# Altium PCB 电眼主板.PcbDoc (part 5 of 5)
Units mm, origin at the board's own origin, x right, y up, seen from the top; angles counter-clockwise.
Board outline 180 x 100 mm, 2 copper layers (Top Layer, Bottom Layer); 210 components, 262 nets, 810 pads, 212 vias.
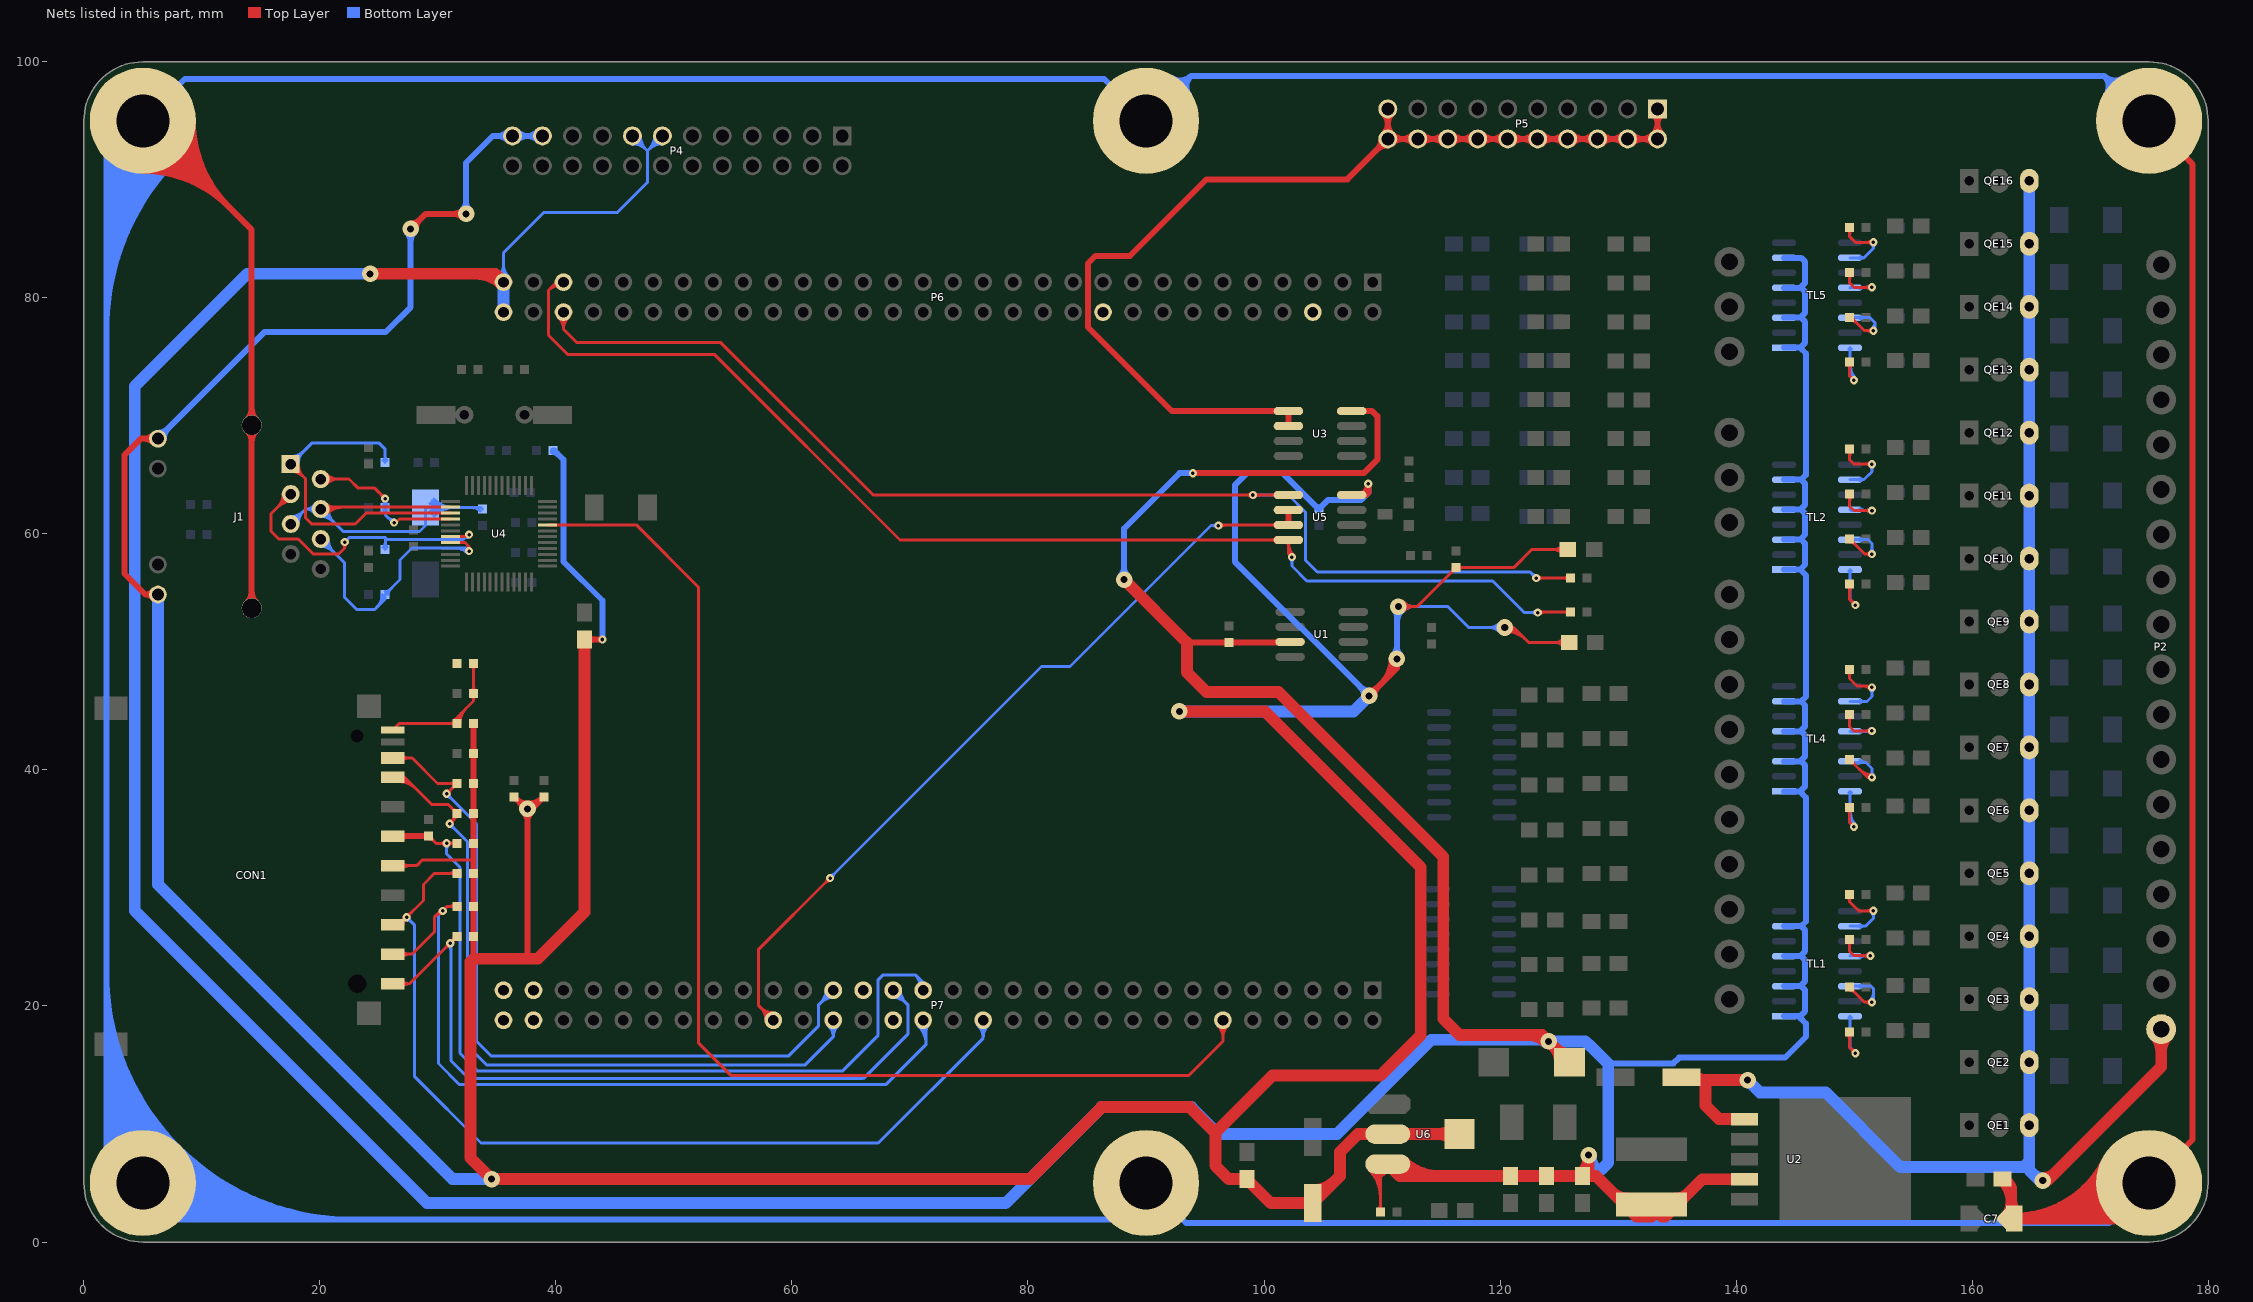
[diagram p5: the nets of this part, all layers, seen from the top]

## Via types
v1: diameter 0.7, hole 0.3, Top Layer to Bottom Layer, 163 vias
v2: diameter 1.4, hole 0.6, Top Layer to Bottom Layer, 49 vias

## Nets (pads, with @x,y where several pads share a name; then routed paths per layer and width w, separated by ;. In a path a pad name is that pad's centre, name@x,y a point inside that pad or via, vN(x,y) a via of type N, cw(c..) or ccw(c..) an arc to the next point about the centre after c; other vN are vias at no path point) (continued)
OUT_CH0: R1.1 TL1.16 | length 7.7
  Top Layer w0.254: R1.1@149.426,17.6 cw(c148.993,17.167) 149.606,17.167 cw(c150.219,17.167) R1.1@149.786,17.6 ; R1.1@149.606,17.78 149.606,16.51 v1(150.114,16.002) ; v1@149.891,16.002 ccw(c149.353,16.002) 149.733,16.383 ccw(c150.114,16.763) v1@150.114,16.225
  Bottom Layer w0.254: TL1.16@149.557,19.029 cw(c149.297,18.769) 149.665,18.769 cw(c150.033,18.769) TL1.16@149.773,19.029 ; TL1.16@149.665,19.137 149.665,16.451 v1(150.114,16.002)
OUT_CH1: R2.1 TL1.14 | length 8.8
  Top Layer w0.254: R2.1@149.606,21.336 cw(c149.606,20.723) 150.04,21.156 cw(c150.473,21.59) R2.1@149.86,21.59 ; R2.1@149.606,21.59 150.876,20.32 v1(151.511,20.32) ; v1@151.353,20.162 ccw(c150.973,19.782) 150.973,20.32 ccw(c150.973,20.858) v1@151.353,20.478
  Bottom Layer w0.254: TL1.14@149.665,21.677 151.424,21.677 151.638,21.463 151.638,20.447 v1(151.511,20.32) ; TL1.14@150.509,21.569 cw(c150.77,21.309) 150.77,21.677 cw(c150.77,22.045) TL1.14@150.509,21.785 ; v1@151.353,20.478 ccw(c150.666,21.165) 151.638,21.165
OUT_CH2: R3.1 TL1.12 | length 7.7
  Top Layer w0.254: R3.1@149.426,25.474 cw(c148.993,25.041) 149.606,25.041 cw(c150.219,25.041) R3.1@149.786,25.474 ; R3.1@149.606,25.654 149.606,24.638 149.987,24.257 v1(151.384,24.257) ; v1@151.226,24.099 ccw(c150.846,23.719) 150.846,24.257 ccw(c150.846,24.795) v1@151.226,24.415
  Bottom Layer w0.254: TL1.12@149.665,24.217 149.705,24.257 v1(151.384,24.257) ; TL1.12@150.509,24.109 cw(c150.866,23.753) 150.866,24.257 ; v1@151.226,24.099 ccw(c150.846,23.719) 150.846,24.257 ccw(c150.846,24.795) v1@151.226,24.415
OUT_CH3: R4.1 TL1.10 | length 9.1
  Top Layer w0.254: R4.1@149.426,29.284 cw(c148.993,28.851) 149.606,28.851 cw(c150.219,28.851) R4.1@149.786,29.284 ; R4.1@149.606,29.464 149.606,28.829 150.368,28.067 v1(151.638,28.067) ; v1@151.48,27.909 ccw(c151.1,27.529) 151.1,28.067 ccw(c151.1,28.605) v1@151.48,28.225
  Bottom Layer w0.254: TL1.10@149.665,26.757 150.963,26.757 151.638,27.432 v1(151.638,28.067) ; TL1.10@150.509,26.649 cw(c150.77,26.389) 150.77,26.757 cw(c150.77,27.125) TL1.10@150.509,26.865 ; v1@151.48,27.909 cw(c151.1,27.529) 151.638,27.529 cw(c152.176,27.529) v1@151.796,27.909
OUT_CH4: R5.1 TL4.16 | length 8.6
  Top Layer w0.254: R5.1@149.426,36.65 cw(c148.993,36.217) 149.606,36.217 cw(c150.219,36.217) R5.1@149.786,36.65 ; R5.1@149.606,36.83 149.606,35.56 v1(149.987,35.179)
  Bottom Layer w0.254: TL4.16@149.557,38.079 cw(c149.297,37.819) 149.665,37.819 cw(c150.033,37.819) TL4.16@149.773,38.079 ; 149.665,35.882 ccw(c150.69,35.882) v1@149.965,35.157 ; 149.665,36.495 ccw(c151.303,36.495) v1@150.145,35.337 ; TL4.16@149.665,38.187 149.665,35.501 v1(149.987,35.179)
OUT_CH5: R6.1 TL4.14 | length 9.5
  Top Layer w0.254: R6.1@149.606,40.64 cw(c149.606,40.027) 150.04,40.46 cw(c150.473,40.894) R6.1@149.86,40.894 ; R6.1@149.606,40.894 151.13,39.37 v1(151.511,39.37) ; 150.48,40.02 ccw(c151.511,41.051) v1@151.511,39.593 ; 150.914,39.586 ccw(c151.511,40.184) v1@151.511,39.339
  Bottom Layer w0.254: TL4.14@149.665,40.727 149.752,40.64 151.003,40.64 151.511,40.132 v1(151.511,39.37) ; TL4.14@150.509,40.835 ccw(c150.98,41.305) 150.98,40.64 ; v1@151.353,39.528 ccw(c150.973,39.908) 151.511,39.908 ccw(c152.049,39.908) v1@151.669,39.528
OUT_CH6: R7.1 TL4.12 | length 8.2
  Top Layer w0.254: R7.1@149.426,44.524 cw(c148.993,44.091) 149.606,44.091 cw(c150.219,44.091) R7.1@149.786,44.524 ; R7.1@149.606,44.704 149.606,43.688 149.987,43.307 v1(151.511,43.307) ; v1@151.353,43.149 ccw(c150.973,42.769) 150.973,43.307 ccw(c150.973,43.845) v1@151.353,43.465
  Bottom Layer w0.254: TL4.12@149.665,43.267 151.344,43.267 151.384,43.307 v1(151.511,43.307) ; TL4.12@150.509,43.159 cw(c150.77,42.899) 150.77,43.267 cw(c150.77,43.635) TL4.12@150.509,43.375 ; 150.876,43.267 ccw(c150.876,43.942) v1@151.353,43.465 ; 151.069,43.267 cw(c151.069,42.865) v1@151.353,43.149
OUT_CH7: R8.1 TL4.10 | length 8.9
  Top Layer w0.254: R8.1@149.426,48.334 cw(c148.993,47.901) 149.606,47.901 cw(c150.219,47.901) R8.1@149.786,48.334 ; R8.1@149.606,48.514 149.606,47.752 150.241,47.117 151.13,47.117 151.257,46.99 v1(151.511,46.99) ; 150.666,47.117 cw(c150.666,46.145) v1@151.353,46.832
  Bottom Layer w0.254: TL4.10@149.665,45.807 151.09,45.807 151.511,46.228 v1(151.511,46.99) ; TL4.10@150.509,45.699 cw(c150.77,45.439) 150.77,45.807 cw(c150.77,46.175) TL4.10@150.509,45.915 ; v1@151.353,46.832 cw(c150.973,46.452) 151.511,46.452 cw(c152.049,46.452) v1@151.669,46.832
OUT_CH8: R9.1 TL2.16 | length 7.6
  Top Layer w0.254: R9.1@149.452,55.573 cw(c149.018,55.14) 149.631,55.14 cw(c150.244,55.14) R9.1@149.811,55.573 ; R9.1@149.631,55.753 149.631,54.458 v1(150.114,53.975) ; v1@149.891,53.975 ccw(c149.353,53.975) 149.733,54.356 ccw(c150.114,54.736) v1@150.114,54.198
  Bottom Layer w0.254: TL2.16@149.557,56.875 cw(c149.297,56.615) 149.665,56.615 cw(c150.033,56.615) TL2.16@149.773,56.875 ; TL2.16@149.665,56.983 149.665,54.424 v1(150.114,53.975)
OUT_CH9: R10.1 TL2.14 | length 8.5
  Top Layer w0.254: R10.1@149.631,59.309 cw(c149.631,58.696) 150.065,59.129 cw(c150.498,59.563) R10.1@149.885,59.563 ; R10.1@149.631,59.563 150.901,58.293 v1(151.511,58.293) ; v1@151.353,58.135 ccw(c150.973,57.755) 150.973,58.293 ccw(c150.973,58.831) v1@151.353,58.451
  Bottom Layer w0.254: TL2.14@149.665,59.523 151.17,59.523 151.511,59.182 v1(151.511,58.293) ; TL2.14@150.509,59.415 cw(c150.77,59.155) 150.77,59.523 cw(c150.77,59.891) TL2.14@150.509,59.631 ; v1@151.353,58.451 ccw(c150.973,58.831) 151.511,58.831 ccw(c152.049,58.831) v1@151.669,58.451
OUT_CH10: R11.1 TL2.12 | length 8.1
  Top Layer w0.254: R11.1@149.452,63.193 cw(c149.018,62.76) 149.631,62.76 cw(c150.244,62.76) R11.1@149.811,63.193 ; R11.1@149.631,63.373 149.631,62.332 149.987,61.976 151.512,61.976 v1(151.518,61.983) ; 150.964,61.976 ccw(c150.964,62.537) v1@151.361,62.14 ; 150.996,61.976 cw(c150.996,61.46) v1@151.361,61.825
  Bottom Layer w0.254: TL2.12@149.665,62.063 149.745,61.983 v1(151.518,61.983) ; TL2.12@150.509,62.171 ccw(c150.963,62.625) 150.963,61.983 ; v1@151.361,61.825 ccw(c150.98,61.444) 150.98,61.983 ccw(c150.98,62.521) v1@151.361,62.14
OUT_CH11: R12.1 TL2.10 | length 8.9
  Top Layer w0.254: R12.1@149.452,67.003 cw(c149.018,66.57) 149.631,66.57 cw(c150.244,66.57) R12.1@149.811,67.003 ; R12.1@149.631,67.183 149.631,66.269 149.987,65.913 v1(151.511,65.913) ; v1@151.353,65.755 ccw(c150.973,65.375) 150.973,65.913 ccw(c150.973,66.451) v1@151.353,66.071
  Bottom Layer w0.254: TL2.10@149.665,64.603 150.836,64.603 151.511,65.278 v1(151.511,65.913) ; TL2.10@150.509,64.495 cw(c150.77,64.235) 150.77,64.603 cw(c150.77,64.971) TL2.10@150.509,64.711 ; v1@151.353,65.755 cw(c150.973,65.375) 151.511,65.375 cw(c152.049,65.375) v1@151.669,65.755
OUT_CH12: R13.1 TL5.16 | length 8.2
  Top Layer w0.254: R13.1@149.452,74.369 cw(c149.018,73.936) 149.631,73.936 cw(c150.244,73.936) R13.1@149.811,74.369 ; R13.1@149.631,74.549 149.631,73.381 v1(149.987,73.025)
  Bottom Layer w0.254: TL5.16@149.557,75.671 cw(c149.297,75.411) 149.665,75.411 cw(c150.033,75.411) TL5.16@149.773,75.671 ; 149.665,73.728 ccw(c150.69,73.728) v1@149.965,73.003 ; 149.665,74.341 ccw(c151.303,74.341) v1@150.145,73.183 ; TL5.16@149.665,75.779 149.665,73.347 v1(149.987,73.025)
OUT_CH13: R14.1 TL5.14 | length 8.6
  Top Layer w0.254: R14.1@149.631,78.105 cw(c149.631,77.246) 150.239,77.853 ; R14.1@149.631,78.359 149.733,78.359 150.876,77.216 v1(151.638,77.216) v1@151.765,77.089 ; R14.1@149.885,78.359 ccw(c150.253,78.359) R14.1@149.993,78.099 ; v1@151.48,77.058 ccw(c151.1,76.678) 151.1,77.216 ccw(c151.1,77.754) v1@151.48,77.374
  Bottom Layer w0.254: TL5.14@149.665,78.319 151.344,78.319 151.765,77.898 ; TL5.14@150.509,78.211 cw(c150.77,77.951) 150.77,78.319 cw(c150.77,78.687) TL5.14@150.509,78.427 ; v1@151.508,77.397 ccw(c151.149,77.898) 151.765,77.898 ; v1(151.638,77.216) 151.765,77.343 151.765,77.898
OUT_CH14: R15.1 TL5.12 | length 7.9
  Top Layer w0.254: R15.1@149.452,81.989 cw(c149.018,81.556) 149.631,81.556 cw(c150.244,81.556) R15.1@149.811,81.989 ; R15.1@149.631,82.169 149.631,81.255 149.987,80.899 v1(151.511,80.899) ; v1@151.353,80.741 ccw(c150.973,80.361) 150.973,80.899 ccw(c150.973,81.437) v1@151.353,81.057
  Bottom Layer w0.254: TL5.12@149.665,80.859 149.705,80.899 v1(151.511,80.899) ; TL5.12@150.509,80.751 cw(c150.866,80.395) 150.866,80.899 ; v1@151.353,80.741 ccw(c150.973,80.361) 150.973,80.899 ccw(c150.973,81.437) v1@151.353,81.057
OUT_CH15: R16.1 TL5.10 | length 9
  Top Layer w0.254: R16.1@149.452,85.799 cw(c149.018,85.366) 149.631,85.366 cw(c150.244,85.366) R16.1@149.811,85.799 ; R16.1@149.631,85.979 149.631,85.192 150.114,84.709 v1(151.638,84.709) ; v1@151.48,84.551 ccw(c151.1,84.171) 151.1,84.709 ccw(c151.1,85.247) v1@151.48,84.867
  Bottom Layer w0.254: TL5.10@149.665,83.399 150.836,83.399 151.638,84.201 ; TL5.10@150.509,83.291 cw(c150.77,83.031) 150.77,83.399 cw(c150.77,83.767) TL5.10@150.509,83.507 ; v1@151.487,84.545 cw(c151.171,84.201) 151.638,84.201 ; v1(151.638,84.709) 151.638,84.201 ; v1@151.789,84.545 ccw(c152.105,84.201) 151.638,84.201
P24V: C5.1 P2.18 QE1.3 QE2.3 QE3.3 QE4.3 QE5.3 QE6.3 QE7.3 QE8.3 QE9.3 QE10.3 QE11.3 QE12.3 QE13.3 QE14.3 QE15.3 QE16.3 U2.1 | length 150.3
  Top Layer w1: C5.1@135.382,13.97 135.636,13.716 137.414,13.716 ; C5.1@136.409,14.147 ccw(c137.449,15.187) 137.449,13.716 ; v2@140.462,13.716 v2(140.97,13.716) 137.414,13.716 ; U2.1@140.716,10.414 138.557,10.414 137.414,11.557 137.414,13.716 ; v2(165.989,5.207) 166.37,5.207 176.022,14.859 P2.18@176.022,18.034 ; v2@165.989,5.407 ccw(c165.989,6.81) 166.981,5.818 ; P2.18@175.478,17.49 cw(c174.163,16.175) 176.022,16.175 cw(c177.881,16.175) P2.18@176.566,17.49 ; 137.414,13.716 cw(c137.414,15.104) 136.412,14.143 ccw(c137.414,15.104) 137.414,13.716
  Bottom Layer w1: v2(140.97,13.716) 142.008,12.678 147.596,12.678 153.924,6.35 164.338,6.35 164.846,6.858 ; 164.846,7.112 164.846,6.858 ; QE16.3@164.846,89.916 QE15.3@164.846,84.582 QE14.3@164.846,79.248 QE13.3@164.846,73.914 QE12.3@164.846,68.58 QE11.3@164.846,63.246 QE10.3@164.846,57.912 QE9.3@164.846,52.578 QE8.3@164.846,47.244 QE7.3@164.846,41.91 QE6.3@164.846,36.576 QE5.3@164.846,31.242 QE4.3@164.846,25.908 QE3.3@164.846,20.574 QE2.3@164.846,15.24 QE1.3@164.846,9.906 164.846,6.858 ; 165.214,5.728 ccw(c165.989,6.503) v2@165.989,5.407 ; v2(165.989,5.207) 165.735,5.207 164.846,6.096 164.846,6.858
PB12: P7.60
PB13: P7.59
PB14: P7.58
PB15: P7.57
PC13: P6.6
PG: C7.1 J1.13 J1.14 pad.0 R39.2 | length 1122.4
  Top Layer w0.508: pad.0@5,90.754 cw(c5,80.503) 12.248,87.752 cw(c19.497,95) pad.0@9.246,95 ; pad.0@5,91.262 cw(c5,82.238) 11.381,88.619 cw(c17.762,95) pad.0@8.738,95 ; pad.0@5,91.77 cw(c5,83.972) 10.514,89.486 cw(c16.028,95) pad.0@8.23,95 ; pad.0@5,92.278 cw(c5,85.707) 9.647,90.353 cw(c14.293,95) pad.0@7.722,95 ; pad.0@5,92.786 cw(c5,87.441) 8.78,91.22 cw(c12.559,95) pad.0@7.214,95 ; pad.0@5,95 14.224,85.776 J1.13@14.224,69.218 J1.14@14.224,53.718 ; J1.14@13.803,54.139 ccw(c12.785,55.157) 14.224,55.157 ccw(c15.663,55.157) J1.14@14.645,54.139 ; J1.13@13.803,68.797 cw(c12.785,67.779) 14.224,67.779 cw(c15.663,67.779) J1.13@14.645,68.797 ; J1.13@13.803,69.639 ccw(c12.785,70.657) 14.224,70.657 ccw(c15.663,70.657) J1.13@14.645,69.639 ; pad.0@175,5 178.689,8.689 178.689,91.311 pad.0@175,95
  Top Layer w1: R39.2@162.56,5.334 163.322,4.572 163.322,2.235 C7.1@163.576,1.981 ; R39.2@162.592,5.239 cw(c160.828,3.475) 163.322,3.475 ; R39.2@162.654,5.203 cw(c162.433,4.342) 163.322,4.342 ; C7.1@162.842,2.131 ccw(c161.685,3.288) 163.322,3.288 ; 163.322,3.493 ccw(c164.699,3.493) C7.1@163.725,2.519 ; 165.204,1.981 ccw(c165.204,9.963) pad.0@172.324,6.356 ; 166.832,1.981 ccw(c166.832,9.138) pad.0@173.216,5.904 ; 168.459,1.981 ccw(c168.459,8.314) pad.0@174.108,5.452 ; 170.087,1.981 ccw(c170.087,7.489) pad.0@175,5 171.981,1.981 C7.1@163.576,1.981 ; pad.0@171.432,6.808 cw(c163.576,10.787) C7.1@163.576,1.981
  Bottom Layer w0.508: 1.905,9.232 ccw(c9.232,9.232) 4.051,4.051 ccw(c9.232,9.232) 9.232,1.905 ; 1.905,10.459 ccw(c10.459,10.459) 4.41,4.41 ccw(c10.459,10.459) 10.459,1.905 ; 1.905,11.685 ccw(c11.685,11.685) 4.769,4.769 ccw(c11.685,11.685) 11.685,1.905 ; 1.905,12.911 ccw(c12.911,12.911) 5.129,5.129 ccw(c12.911,12.911) 12.911,1.905 ; 1.905,14.138 ccw(c14.138,14.138) 5.488,5.488 ccw(c14.138,14.138) 14.138,1.905 ; 1.905,15.364 ccw(c15.364,15.364) 5.847,5.847 ccw(c15.364,15.364) 15.364,1.905 ; 1.905,16.591 ccw(c16.591,16.591) 6.206,6.206 ccw(c16.591,16.591) 16.591,1.905 ; 1.905,17.817 ccw(c17.817,17.817) 6.566,6.566 ccw(c17.817,17.817) 17.817,1.905 ; 1.905,19.043 ccw(c19.043,19.043) 6.925,6.925 ccw(c19.043,19.043) 19.043,1.905 ; 1.905,20.27 ccw(c20.27,20.27) 7.284,7.284 ccw(c20.27,20.27) 20.27,1.905 ; 1.905,21.496 ccw(c21.496,21.496) 7.643,7.643 ccw(c21.496,21.496) 21.496,1.905 ; 1.905,22.723 ccw(c22.723,22.723) 8.002,8.002 ccw(c22.723,22.723) 22.723,1.905 ; 1.905,77.277 cw(c22.723,77.277) pad.0@8.002,91.998 ; 1.905,78.504 cw(c21.496,78.504) pad.0@7.643,92.357 ; 1.905,79.73 cw(c20.27,79.73) pad.0@7.284,92.716 ; 1.905,80.957 cw(c19.043,80.957) pad.0@6.925,93.075 ; 1.905,82.183 cw(c17.817,82.183) pad.0@6.566,93.434 ; 1.905,83.409 cw(c16.591,83.409) pad.0@6.206,93.794 ; 1.905,84.636 cw(c15.364,84.636) pad.0@5.847,94.153 ; 1.905,85.862 cw(c14.138,85.862) pad.0@5.488,94.512 ; 1.905,87.089 cw(c12.911,87.089) pad.0@5.129,94.871 ; 1.905,88.315 cw(c11.685,88.315) pad.0@4.769,95.231 ; 1.905,89.541 cw(c10.459,89.541) pad.0@4.41,95.59 ; 1.905,90.768 cw(c9.232,90.768) pad.0@4.051,95.949 ; pad.0@91.955,98.186 ccw(c92.549,99.153) 93.351,98.351 ccw(c94.153,97.549) pad.0@93.186,96.955 ; pad.0@92.221,98.619 ccw(c92.895,99.717) 93.806,98.806 ; pad.0@93.619,97.221 cw(c94.717,97.895) 93.806,98.806 ; pad.0@171.381,97.221 ccw(c170.283,97.895) 171.194,98.806 ccw(c172.105,99.717) pad.0@172.779,98.619 ; pad.0@171.814,96.955 ccw(c170.847,97.549) 171.649,98.351 ccw(c172.451,99.153) pad.0@173.045,98.186 ; pad.0@175,5 171.611,1.611 93.389,1.611 pad.0@90,5 86.905,1.905 8.095,1.905 pad.0@5,5 1.905,8.095 1.905,91.905 pad.0@5,95 8.552,98.552 86.448,98.552 pad.0@90,95 93.806,98.806 ; pad.0@175,95 171.194,98.806 93.806,98.806
PG15: P7.12 U4.32 | length 105.9
  Top Layer w0.254: U4.32@39.283,60.768 46.801,60.768 52.07,55.499 52.07,16.891 54.864,14.097 93.599,14.097 96.52,17.018 P7.12@96.52,18.796 ; P7.12@96.079,18.355 cw(c95.016,17.292) 96.52,17.292 cw(c98.024,17.292) P7.12@96.961,18.355 ; P7.12@96.259,18.535 cw(c95.629,17.905) 96.52,17.905 cw(c97.411,17.905) P7.12@96.781,18.535
RESET: P6.20
RS485_RE: P7.42 U5.2 U5.3 | length 75.6
  Top Layer w0.254: P7.42@57.797,18.796 ccw(c56.293,18.796) 57.356,19.86 ccw(c58.42,20.923) P7.42@58.42,19.419 ; P7.42@58.051,18.796 ccw(c57.16,18.796) 57.79,19.426 ccw(c58.42,20.056) P7.42@58.42,19.165 ; P7.42@58.42,18.796 57.15,20.066 57.15,24.765 v1(63.226,30.841) ; v1@63.003,30.841 cw(c62.464,30.841) 62.845,30.46 cw(c63.226,30.079) v1@63.226,30.618 ; v1(96.139,60.706) 96.19,60.757 U5.3@102.071,60.757 ; v1@96.297,60.548 cw(c96.8,60.045) 96.8,60.757 ; v1@96.297,60.864 ccw(c96.555,61.122) 96.555,60.757 ; U5.3@101.013,60.599 ccw(c100.633,60.218) 100.633,60.757 ccw(c100.633,61.295) U5.3@101.013,60.914
  Top Layer w0.508: U5.3@102.071,60.757 U5.2@102.071,62.027
  Bottom Layer w0.254: v1(63.226,30.841) 81.153,48.768 83.566,48.768 95.504,60.706 v1(96.139,60.706) ; v1@63.226,31.064 ccw(c63.226,31.602) 63.607,31.222 ccw(c63.987,30.841) v1@63.449,30.841 ; v1@95.981,60.548 ccw(c95.601,60.168) 95.601,60.706 ccw(c95.601,61.244) v1@95.981,60.864
SDCLK: C2.2 CON1.5 P7.31 R20.2 | length 78.9
  Top Layer w0.254: C2.2@29.177,34.384 C2.2@29.21,34.417 29.845,33.782 R20.2@31.623,33.782 ; C2.2@29.21,34.163 cw(c29.21,33.55) 29.644,33.983 cw(c30.077,34.417) C2.2@29.464,34.417 ; v1@30.576,33.624 ccw(c30.196,33.244) 30.196,33.782 ccw(c30.196,34.32) v1@30.576,33.94 ; v1@30.892,33.624 cw(c31.272,33.244) 31.272,33.782 cw(c31.272,34.32) v1@30.892,33.94 ; R20.2@31.443,33.602 ccw(c31.01,33.169) 31.01,33.782 ccw(c31.01,34.395) R20.2@31.443,33.962
  Top Layer w0.508: CON1.5@26.162,34.384 C2.2@29.177,34.384 ; CON1.5@26.836,34.21 cw(c27.256,33.79) 27.256,34.384 cw(c27.256,34.978) CON1.5@26.836,34.558 ; 28.824,34.384 ccw(c28.824,34.803) C2.2@29.12,34.507
  Bottom Layer w0.254: v1@30.576,33.624 cw(c30.196,33.244) 30.734,33.244 cw(c31.272,33.244) v1@30.892,33.624 ; v1(30.734,33.782) 30.734,32.893 31.877,31.75 31.877,16.002 33.401,14.478 64.262,14.478 67.31,17.526 67.31,22.225 67.691,22.606 70.485,22.606 71.12,21.971 P7.31@71.12,21.336 ; 70.468,22.623 cw(c69.628,21.783) P7.31@70.766,21.442 ; 70.769,22.322 cw(c70.092,21.644) P7.31@71.01,21.369
SDCMD: CON1.2 P7.28 R21.2 | length 86.2
  Top Layer w0.254: CON1.2@26.162,26.884 26.71,26.884 v1(27.345,27.519) ; CON1.2@26.676,27.257 ccw(c26.71,28.154) v1(27.345,27.519) ; CON1.2@27.035,26.884 cw(c27.821,26.884) v1@27.265,27.439 ; v1@27.122,27.519 cw(c26.583,27.519) 26.964,27.139 cw(c27.345,26.758) v1@27.345,27.296 ; v1@27.345,27.742 ccw(c27.345,28.281) 27.725,27.9 ccw(c28.106,27.519) v1@27.568,27.519 ; R21.2@31.443,31.062 ccw(c31.01,30.629) 31.01,31.242 ccw(c31.01,31.855) R21.2@31.443,31.422 ; R21.2@31.623,31.242 29.718,31.242 28.771,30.295 28.771,28.946 v1(27.345,27.519)
  Bottom Layer w0.254: v1@27.345,27.296 cw(c27.345,26.758) 27.725,27.139 cw(c28.106,27.519) v1@27.568,27.519 ; v1(27.345,27.519) 28.027,26.837 28.027,14.01 33.655,8.382 67.31,8.382 76.2,17.272 P7.28@76.2,18.796 ; P7.28@75.759,18.355 cw(c74.696,17.292) 76.2,17.292 cw(c77.704,17.292) P7.28@76.641,18.355 ; P7.28@75.939,18.535 cw(c75.309,17.905) 76.2,17.905 cw(c77.091,17.905) P7.28@76.461,18.535
SDDATA0: CON1.7 P7.38 R19.2 | length 72.5
  Top Layer w0.254: CON1.7@26.162,39.384 27.164,39.384 ; CON1.7@26.662,39.011 cw(c26.662,36.899) 28.156,38.392 ; CON1.7@26.662,39.265 cw(c26.662,37.766) 27.722,38.826 ; CON1.7@26.662,39.519 cw(c26.662,38.633) 27.289,39.259 ; CON1.7@27.019,39.276 cw(c27.164,39.233) 27.164,39.384 ; CON1.7@27.019,39.492 ccw(c27.164,39.535) 27.164,39.384 ; v1(30.988,35.433) 31.623,36.068 R19.2@31.623,36.322 ; v1@30.988,35.656 ccw(c30.988,36.194) 31.369,35.814 ccw(c31.749,35.433) v1@31.211,35.433 ; v1@31.115,35.56 ccw(c30.484,36.191) R19.2@31.371,36.293 ; R19.2@31.369,36.322 ccw(c30.756,36.322) 31.189,36.756 ccw(c31.623,37.189) R19.2@31.623,36.576 ; 31.487,35.932 ccw(c31.151,36.268) R19.2@31.623,36.322 ; 27.164,39.384 29.464,37.084 30.861,37.084 R19.2@31.623,36.322
  Bottom Layer w0.254: v1@30.988,35.21 cw(c30.988,34.672) 31.369,35.052 cw(c31.749,35.433) v1@31.211,35.433 ; v1(30.988,35.433) 32.512,33.909 32.512,16.637 34.163,14.986 61.087,14.986 63.5,17.399 ; P7.38@63.084,18.332 cw(c62.245,17.399) 63.5,17.399 ; P7.38@63.253,18.521 cw(c62.757,17.969) 63.5,17.969 cw(c64.243,17.969) P7.38@63.747,18.521 ; P7.38@63.5,18.796 63.5,17.399 ; P7.38@63.916,18.332 ccw(c64.755,17.399) 63.5,17.399
SDDATA1: CON1.8 P7.37 R18.2 | length 72.5
  Top Layer w0.254: CON1.8@26.162,41.009 27.825,41.009 29.972,38.862 R18.2@31.623,38.862 v1(30.734,37.973) ; CON1.8@26.926,40.745 cw(c27.562,40.109) 27.562,41.009 cw(c27.562,41.91) CON1.8@26.926,41.273 ; v1@30.734,38.196 ccw(c30.734,38.734) 31.115,38.354 ccw(c31.495,37.973) v1@30.957,37.973 ; R18.2@31.369,38.862 cw(c30.756,38.862) 31.189,38.428 cw(c31.623,37.995) R18.2@31.623,38.608 ; R18.2@31.443,38.682 ccw(c31.01,38.249) 31.01,38.862 ccw(c31.01,39.475) R18.2@31.443,39.042
  Bottom Layer w0.254: v1@30.734,37.75 cw(c30.734,37.212) 31.115,37.592 cw(c31.495,37.973) v1@30.957,37.973 ; v1(30.734,37.973) 33.274,35.433 33.274,17.018 34.544,15.748 59.69,15.748 62.23,18.288 62.23,20.066 P7.37@63.5,21.336 ; P7.37@62.877,21.336 cw(c61.373,21.336) 62.436,20.272 cw(c63.5,19.209) P7.37@63.5,20.713 ; P7.37@63.131,21.336 cw(c62.24,21.336) 62.87,20.706 cw(c63.5,20.076) P7.37@63.5,20.967
SDDATA2: CON1.9 P7.33 R23.2 | length 73.6
  Top Layer w0.254: CON1.9@26.162,21.884 27.599,21.884 R23.2@31.623,25.908 v1(31.039,25.324) ; CON1.9@26.926,21.62 cw(c27.562,20.984) 27.562,21.884 cw(c27.562,22.785) CON1.9@26.926,22.148 ; v1@30.816,25.324 cw(c30.277,25.324) 30.658,24.943 cw(c31.039,24.562) v1@31.039,25.101 ; v1@31.189,25.474 ccw(c30.756,25.908) 31.369,25.908 cw(c30.756,25.908) v1@31.189,25.474 ; v1@31.189,25.474 cw(c31.623,25.041) 31.623,25.654 ccw(c31.623,25.041) v1@31.189,25.474 ; R23.2@31.419,25.704 ccw(c31.8,25.324) 31.262,25.324 cw(c31.8,25.324) R23.2@31.419,25.704 ; R23.2@31.419,25.704 cw(c31.039,26.085) 31.039,25.547 ccw(c31.039,26.085) R23.2@31.419,25.704
  Bottom Layer w0.254: v1@30.881,25.166 cw(c30.316,24.601) 31.115,24.601 ; v1(31.039,25.324) 31.115,25.247 31.115,15.367 32.639,13.843 66.04,13.843 69.85,17.653 69.85,20.066 P7.33@68.58,21.336 ; 31.115,24.97 cw(c31.392,24.97) v1@31.196,25.166 ; P7.33@68.58,20.713 cw(c68.58,19.209) 69.644,20.272 cw(c70.707,21.336) P7.33@69.203,21.336 ; P7.33@68.58,20.967 cw(c68.58,20.076) 69.21,20.706 cw(c69.84,21.336) P7.33@68.949,21.336
SDDATA3: CON1.1 P7.32 R22.2 | length 74.3
  Top Layer w0.254: CON1.1@26.162,24.384 27.813,24.384 29.718,26.289 29.718,27.559 v1@30.306,28.147 ; CON1.1@26.926,24.12 cw(c27.562,23.484) 27.562,24.384 cw(c27.562,25.284) CON1.1@26.926,24.648 ; 29.699,27.54 cw(c30.4,26.839) v1@30.4,27.83 ; v1@30.494,28.053 v1(30.4,28.053) 30.794,28.448 R22.2@31.623,28.448 ; R22.2@31.443,28.268 ccw(c31.01,27.835) 31.01,28.448 ccw(c31.01,29.061) R22.2@31.443,28.628
  Bottom Layer w0.254: v1(30.4,28.053) 30.045,27.699 30.045,15.12 31.83,13.335 67.945,13.335 71.374,16.764 71.374,18.542 P7.32@71.12,18.796 ; P7.32@70.69,18.345 cw(c69.168,16.748) 71.374,16.748 ; P7.32@70.865,18.529 cw(c69.733,17.341) 71.374,17.341 ; P7.32@71.041,18.713 cw(c70.299,17.934) 71.374,17.934 ; 71.374,17.905 cw(c72.011,17.905) P7.32@71.561,18.355
TPRX+: J1.1 R42.2 U4.3 | length 36.7
  Top Layer w0.254: J1.1@17.526,65.283 cw(c17.526,63.75) 18.61,64.834 cw(c19.694,65.918) J1.1@18.161,65.918 ; J1.1@17.526,65.537 cw(c17.526,64.617) 18.176,65.268 cw(c18.827,65.918) J1.1@17.907,65.918 ; J1.1@17.526,65.918 18.796,64.648 18.796,61.341 19.304,60.833 22.987,60.833 23.922,61.768 U4.3@31.083,61.768
  Bottom Layer w0.254: J1.1@17.526,65.918 19.299,67.691 25.019,67.691 25.527,67.183 R42.2@25.527,66.04 ; J1.1@17.526,66.299 ccw(c17.526,67.219) 18.176,66.568 ccw(c18.827,65.918) J1.1@17.907,65.918 ; J1.1@17.526,66.553 ccw(c17.526,68.086) 18.61,67.002 ccw(c19.694,65.918) J1.1@18.161,65.918 ; R42.2@25.347,66.22 ccw(c24.914,66.653) 25.527,66.653 ccw(c26.14,66.653) R42.2@25.707,66.22
TPRX-: J1.2 R43.2 U4.4 | length 21.7
  Top Layer w0.254: J1.2@20.066,64.648 22.474,64.648 23.241,63.881 24.638,63.881 v1(25.527,62.992) ; J1.2@20.335,64.379 cw(c20.986,63.728) 20.986,64.648 cw(c20.986,65.568) J1.2@20.335,64.917 ; J1.2@20.515,64.199 cw(c21.599,63.115) 21.599,64.648 cw(c21.599,66.181) J1.2@20.515,65.097 ; v1@25.304,62.992 ccw(c24.766,62.992) 25.146,63.373 ccw(c25.527,63.753) v1@25.527,63.215 ; v1(26.289,60.96) 26.43,60.96 26.738,61.268 U4.4@31.083,61.268
  Bottom Layer w0.254: R43.2@25.347,62.41 ccw(c24.834,62.923) v1@25.56,62.923 ; R43.2@25.358,62.04 cw(c24.959,61.591) 25.56,61.591 ; v1@25.369,62.834 cw(c24.909,62.374) R43.2@25.56,62.374 ; v1(25.527,62.992) 25.545,62.992 25.56,62.977 25.56,62.263 25.56,61.592 ; 25.56,61.696 cw(c26.061,61.696) R43.2@25.707,62.05 ; R43.2@25.56,62.533 cw(c25.986,62.533) v1@25.685,62.834 ; v1@25.56,62.764 ccw(c26.061,62.764) R43.2@25.707,62.41 ; 25.742,61.41 ccw(c26.289,61.956) v1@26.289,61.183 ; 25.977,61.175 cw(c25.763,60.96) v1@26.066,60.96 ; v1(26.289,60.96) 26.192,60.96 25.56,61.592
TPTX+: J1.3 R44.2 U4.7 | length 31.5
  Top Layer w0.254: J1.3@16.891,63.378 cw(c15.358,63.378) 16.442,62.294 cw(c17.526,61.21) J1.3@17.526,62.743 ; J1.3@17.145,63.378 cw(c16.225,63.378) 16.876,62.728 cw(c17.526,62.077) J1.3@17.526,62.997 ; J1.3@17.526,63.378 15.875,61.727 15.875,60.198 16.51,59.563 18.161,59.563 19.431,58.293 21.591,58.293 22.098,58.8 ; v1@21.947,59.145 cw(c21.628,58.8) 22.098,58.8 ; v1(22.098,59.309) 22.098,58.8 ; v1@22.249,59.145 ccw(c22.568,58.8) 22.098,58.8 ; U4.7@31.083,59.768 32.463,59.768 v1(32.639,59.944)
  Bottom Layer w0.254: v1(22.098,59.309) 22.479,59.69 25.56,59.69 ; R44.2@25.347,58.854 ccw(c24.834,59.367) 25.56,59.367 ; R44.2@25.527,58.674 25.56,58.707 25.56,59.69 ; 25.56,59.208 ccw(c26.061,59.208) R44.2@25.707,58.854 ; 32.042,59.474 cw(c32.639,58.876) v1@32.639,59.721 ; v1(32.639,59.944) 32.512,59.944 32.086,59.518 25.732,59.518 25.56,59.69
TPTX-: J1.6 R45.2 U4.8 | length 31.3
  Top Layer w0.254: U4.8@31.083,59.268 32.299,59.268 32.639,58.928 v1(32.639,58.547) ; 32.48,59.087 cw(c32.013,58.619) v1@32.67,58.543
  Bottom Layer w0.254: J1.6@20.066,58.933 cw(c20.066,57.4) 21.15,58.484 cw(c22.234,59.568) J1.6@20.701,59.568 ; J1.6@20.066,59.187 cw(c20.066,58.267) 20.716,58.918 cw(c21.367,59.568) J1.6@20.447,59.568 ; J1.6@20.066,59.568 22.098,57.536 22.098,54.61 23.114,53.594 24.638,53.594 25.527,54.483 R45.2@25.527,54.864 ; 24.829,53.785 ccw(c23.756,54.858) R45.2@25.273,54.863 ; 25.26,54.216 ccw(c24.615,54.861) R45.2@25.527,54.864 ; R45.2@25.527,55.118 ccw(c25.527,55.731) 25.961,55.298 ccw(c26.394,54.864) R45.2@25.781,54.864 ; 31.487,58.801 cw(c31.487,57.395) v1@32.481,58.389 ; 32.101,58.801 cw(c32.101,58.009) v1@32.661,58.569 ; v1(32.639,58.547) 32.385,58.801 27.813,58.801 26.797,57.785 26.797,56.134 R45.2@25.527,54.864
USART1_RX: P7.34
USART1_TX: P7.35
USART3_RX: P6.56 R32.1 U5.1 | length 110.5
  Top Layer w0.254: P6.56@40.211,78.345 cw(c39.257,77.343) 40.64,77.343 ; P6.56@40.386,78.529 cw(c39.821,77.935) 40.64,77.935 cw(c41.459,77.935) P6.56@40.894,78.529 ; P6.56@40.64,78.796 40.64,77.343 ; P6.56@41.069,78.345 ccw(c42.023,77.343) 40.64,77.343 ; v1@98.902,63.139 ccw(c98.522,62.758) 98.522,63.297 ccw(c98.522,63.835) v1@98.902,63.454 ; v1@99.218,63.139 cw(c99.598,62.758) 99.598,63.297 cw(c99.598,63.835) v1@99.218,63.454 ; U5.1@101.013,63.139 ccw(c100.633,62.758) 100.633,63.297 ccw(c100.633,63.835) U5.1@101.013,63.454 ; U5.1@102.071,63.297 66.878,63.297 53.975,76.2 41.783,76.2 40.64,77.343 ; v1(123.063,56.261) R32.1@125.984,56.261 ; v1@123.221,56.103 cw(c123.601,55.723) 123.601,56.261 cw(c123.601,56.799) v1@123.221,56.419 ; R32.1@125.804,56.081 ccw(c125.371,55.648) 125.371,56.261 ccw(c125.371,56.874) R32.1@125.804,56.441
  Bottom Layer w0.254: v1(99.06,63.297) 102.071,63.297 103.505,61.863 103.505,57.785 104.521,56.769 122.555,56.769 v1(123.063,56.261) ; v1@99.218,63.139 cw(c99.598,62.758) 99.598,63.297 cw(c99.598,63.835) v1@99.218,63.454 ; v1@122.84,56.261 ccw(c122.302,56.261) 122.682,56.642 ccw(c123.063,57.022) v1@123.063,56.484
USART3_TX: P6.55 R31.1 U5.4 | length 112.2
  Top Layer w0.254: 39.393,80.668 cw(c40.24,79.821) P6.55@40.546,80.979 ; 39.705,80.98 cw(c40.371,80.315) P6.55@40.611,81.225 ; P6.55@40.64,81.336 40.061,81.336 39.37,80.645 39.37,76.835 41.021,75.184 53.467,75.184 69.164,59.487 U5.4@102.071,59.487 102.071,58.33 v1(102.362,58.039) ; U5.4@101.013,59.329 ccw(c100.633,58.948) 100.633,59.487 ccw(c100.633,60.025) U5.4@101.013,59.644 ; U5.4@101.913,59.329 cw(c101.533,58.948) 102.071,58.948 cw(c102.609,58.948) U5.4@102.229,59.329 ; 102.071,58.667 ccw(c102.99,58.667) v1@102.34,58.017 ; U5.4@102.071,59.28 ccw(c103.603,59.28) v1@102.52,58.197 ; v1(123.19,53.34) 123.444,53.34 123.475,53.371 R31.1@125.974,53.371 ; v1@123.348,53.182 cw(c123.803,52.727) 123.803,53.371 ; v1@123.348,53.498 ccw(c123.654,53.804) 123.654,53.371 ; R31.1@125.794,53.191 ccw(c125.361,52.758) 125.361,53.371 ccw(c125.361,53.984) R31.1@125.794,53.551
  Bottom Layer w0.254: v1@102.204,57.881 cw(c101.824,57.501) 102.362,57.501 cw(c102.9,57.501) v1@102.52,57.881 ; v1(102.362,58.039) 102.362,57.277 103.632,56.007 119.38,56.007 122.047,53.34 v1(123.19,53.34) ; v1@123.032,53.182 ccw(c122.652,52.802) 122.652,53.34 ccw(c122.652,53.878) v1@123.032,53.498
VCC5V: C1.1 C4.2 C6.1 C10.2 CT1.1 L1.2 P4.13 P4.15 P6.59 P6.60 R29.2 TL1.1 TL1.3 TL1.5 TL1.7 TL2.1 TL2.3 TL2.5 TL2.7 TL4.1 TL4.3 TL4.5 TL4.7 TL5.1 TL5.3 TL5.5 TL5.7 U1.3 U2.4 U3.8 U6.3 | length 564.8
  Top Layer w0.254: U6.3@108.915,6.109 cw(c106.646,3.84) 109.855,3.84 ; U6.3@109.095,6.289 cw(c107.259,4.453) 109.855,4.453 ; U6.3@109.274,6.468 cw(c107.872,5.066) 109.855,5.066 ; U6.3@109.454,6.648 cw(c108.485,5.679) 109.855,5.679 ; R29.2@109.675,2.72 ccw(c109.242,3.153) 109.855,3.153 ccw(c110.468,3.153) R29.2@110.035,2.72 ; R29.2@109.855,2.54 U6.3@109.855,5.97
  Top Layer w0.508: 93.472,50.8 C1.1@97.028,50.8 102.16,50.8 U1.3@102.211,50.851 ; v1(93.98,65.151) 108.458,65.151 109.601,66.294 109.601,69.977 109.169,70.409 U3.8@107.428,70.409 ; 100.956,50.8 ccw(c100.956,51.205) U1.3@101.243,50.919
  Top Layer w1: v2(24.257,82.042) 34.854,82.042 P6.59@35.56,81.336 ; 33.252,82.042 cw(c33.252,79.028) P6.59@35.383,81.159 ; v2@88.201,56.134 88.201,56.07 93.472,50.8 93.472,48.26 95.123,46.609 101.219,46.609 115.189,32.639 115.189,18.923 116.573,17.539 123.584,17.539 v2(124.121,17.001) CT1.1@125.882,15.24 125.882,15.171 125.918,15.136 125.946,15.136 CT1.1@125.966,15.156 ; U6.3@109.855,5.97 U6.3@110.488,6.603 111.504,5.588 C10.2@120.904,5.588 C6.1@123.952,5.588 C4.2@127,5.588 ; U6.3@111.091,6.126 ccw(c112.39,7.426) 112.39,5.588 ; U6.3@111.798,6.833 ccw(c114.805,9.84) 114.805,5.588 ; 122.341,17.539 cw(c122.341,15.221) v2@123.98,16.86 ; v2@124.525,16.598 cw(c123.167,15.24) CT1.1@125.087,15.24 ; CT1.1@124.739,16.383 ccw(c125.793,17.438) CT1.1@125.793,15.946 ; C4.2@126.905,5.81 ccw(c125.448,7.267) v2@127.508,7.267 ; v2(127.508,7.366) 127.508,6.096 C4.2@127,5.588 ; 129.5,4.231 ccw(c130.842,5.573) L1.2@130.842,3.675 ; 129.683,4.048 ccw(c130.617,4.982) L1.2@130.78,3.671 ; L1.2@132.537,2.779 cw(c132.06,2.159) 132.842,2.159 ; L1.2@133.147,2.779 ccw(c133.624,2.159) 132.842,2.159 ; 133.731,2.159 133.985,2.159 137.14,5.314 U2.4@140.716,5.314 ; L1.2@134.842,3.675 ccw(c134.842,5.266) 135.967,4.141 ; L1.2@134.882,3.673 ccw(c134.982,4.907) 135.858,4.032 ; C4.2@127,5.588 128.143,5.588 131.572,2.159 132.842,2.159
  Bottom Layer w0.254: P6.59@35.119,81.777 ccw(c34.056,82.84) 35.56,82.84 ccw(c37.064,82.84) P6.59@36.001,81.777 ; P6.59@35.299,81.597 ccw(c34.669,82.227) 35.56,82.227 ccw(c36.451,82.227) P6.59@35.821,81.597 ; P6.59@35.56,81.336 35.56,83.82 38.989,87.249 45.212,87.249 47.752,89.789 47.752,92.456 ; P4.15@46.482,93.053 cw(c46.482,91.428) 47.631,92.577 cw(c48.78,93.726) P4.15@47.155,93.726 ; P4.15@46.482,93.307 cw(c46.482,92.295) 47.197,93.011 cw(c47.913,93.726) P4.15@46.901,93.726 ; P4.15@46.482,93.726 47.752,92.456 ; P4.13@48.349,93.726 cw(c46.724,93.726) 47.873,92.577 cw(c49.022,91.428) P4.13@49.022,93.053 ; P4.13@48.603,93.726 cw(c47.591,93.726) 48.307,93.011 cw(c49.022,92.295) P4.13@49.022,93.307 ; P4.13@49.022,93.726 47.752,92.456
  Bottom Layer w0.508: v2@87.823,56.449 ccw(c87.061,57.211) 88.138,57.211 ccw(c89.215,57.211) v2@88.453,56.449 ; v2(88.138,56.134) 88.138,60.452 92.837,65.151 v1(93.98,65.151) ; 129.166,15.136 134.684,15.136 135.169,15.621 144.145,15.621 145.923,17.399 145.923,18.502 145.434,18.991 145.434,19.137 ; TL1.1@144.077,19.137 145.434,19.137 ; TL1.3@144.077,21.677 145.434,21.677 ; TL1.5@144.077,24.217 145.434,24.217 ; TL1.7@144.077,26.757 145.517,26.757 ; TL4.1@144.077,38.187 145.387,38.187 145.923,37.651 145.923,27.163 145.517,26.757 ; TL4.7@144.077,45.807 145.517,45.807 ; TL2.1@144.077,56.983 145.434,56.983 ; TL2.3@144.077,59.523 145.434,59.523 ; TL2.5@144.077,62.063 145.434,62.063 ; TL2.7@144.077,64.603 145.517,64.603 ; TL5.1@144.077,75.779 145.434,75.779 ; TL5.3@144.077,78.319 145.434,78.319 ; TL5.5@144.077,80.859 145.434,80.859 ; TL5.7@144.077,83.399 145.517,83.399 145.858,83.058 145.858,81.283 145.434,80.859 ; 145.434,38.187 145.858,38.611 145.858,40.386 145.517,40.727 TL4.3@144.077,40.727 145.434,40.727 145.858,41.151 145.858,42.926 145.517,43.267 TL4.5@144.077,43.267 145.434,43.267 145.858,43.691 145.858,45.466 145.517,45.807 ; 145.434,19.137 145.858,19.561 145.858,21.336 145.517,21.677 145.434,21.677 ; 145.434,21.677 145.858,22.101 145.858,23.876 145.517,24.217 145.434,24.217 ; 145.434,24.217 145.858,24.641 145.858,26.416 145.517,26.757 ; 145.434,56.983 145.923,56.494 145.923,46.213 145.517,45.807 ; 145.434,56.983 145.858,57.407 145.858,59.182 145.517,59.523 145.434,59.523 ; 145.434,59.523 145.858,59.947 145.858,61.722 145.517,62.063 145.434,62.063 ; 145.434,62.063 145.858,62.487 145.858,64.262 145.517,64.603 ; 145.434,75.779 145.923,75.29 145.923,65.009 145.517,64.603 ; 145.434,75.779 145.858,76.203 145.858,77.978 145.517,78.319 145.434,78.319 ; 145.434,78.319 145.858,78.743 145.858,80.518 145.517,80.859 145.434,80.859
  Bottom Layer w1: v2(24.257,82.042) 13.843,82.042 4.318,72.517 4.318,28.067 29.083,3.302 78.105,3.302 86.233,11.43 93.853,11.43 96.139,9.144 106.172,9.144 114.173,17.145 123.977,17.145 v2(124.121,17.001) 127.216,17.001 127.513,16.704 127.513,16.746 129.123,15.136 129.166,15.136 129.166,6.724 128.537,6.096 128.27,6.096 127.508,6.858 v2(127.508,7.366) ; P6.60@35.56,78.796 P6.59@35.56,81.336 ; 123.291,17.145 cw(c123.291,16.172) v2@123.98,16.86 ; v2@127.705,7.332 ccw(c128.806,7.14) 128.016,6.35
VDD25V: C9.2 CT2.1 J1.4 J1.5 U4.2 | length 53
  Top Layer w0.254: J1.4@20.066,62.108 20.226,62.268 U4.2@31.083,62.268 ; J1.4@20.335,61.839 cw(c21.372,60.802) 21.372,62.268 ; J1.4@20.515,61.659 cw(c21.985,60.189) 21.985,62.268 ; J1.4@20.515,62.557 ccw(c21.213,63.255) 21.213,62.268
  Bottom Layer w0.254: J1.5@17.526,60.838 18.796,62.108 ; J1.5@17.526,61.219 ccw(c17.526,62.139) 18.176,61.488 ccw(c18.827,60.838) J1.5@17.907,60.838 ; J1.5@17.526,61.473 ccw(c17.526,63.006) 18.61,61.922 ccw(c19.694,60.838) J1.5@18.161,60.838 ; J1.4@19.558,61.727 ccw(c18.796,61.156) 18.796,62.108 ; J1.4@19.558,62.489 cw(c18.796,63.06) 18.796,62.108 ; J1.4@20.066,61.473 cw(c20.066,59.94) 21.15,61.024 cw(c22.234,62.108) J1.4@20.701,62.108 ; J1.4@20.066,61.727 cw(c20.066,60.807) 20.716,61.458 cw(c21.367,62.108) J1.4@20.447,62.108 ; CT2.1@29.315,61.871 cw(c30.182,61.004) 30.182,62.23 cw(c30.182,63.456) CT2.1@29.315,62.589 ; CT2.1@29.495,61.691 cw(c30.796,60.39) 30.796,62.23 cw(c30.796,64.07) CT2.1@29.495,62.769 ; CT2.1@29.674,61.512 cw(c31.409,59.777) 31.409,62.23 cw(c31.409,64.683) CT2.1@29.674,62.948 ; 32.862,62.23 cw(c32.862,61.183) C9.2@33.602,61.923 ; C9.2@33.782,62.103 33.655,62.23 CT2.1@28.956,62.23 28.956,60.706 28.448,60.198 21.976,60.198 J1.4@20.066,62.108 18.796,62.108
VDD33V: C3.2 C11.2 C12.1 CON1.4 FB1.2 J1.9 J1.12 LED41.1 LED42.1 P4.21 P4.23 R18.1 R19.1 R20.1 R21.1 R22.1 R23.1 R24.1 R25.1 R28.2 R34.2 R36.1 R37.1 U5.8 U6.2 U6.4 | length 560.8
  Top Layer w0.254: CON1.4@26.162,31.884 28.201,31.884 28.702,32.385 33.02,32.385 ; CON1.4@26.926,31.62 cw(c27.562,30.984) 27.562,31.884 cw(c27.562,32.785) CON1.4@26.926,32.148 ; v2(111.379,53.848) 112.979,53.848 R28.2@116.275,57.143 121.151,57.143 122.682,58.674 LED42.1@125.755,58.674 ; v2@111.605,53.622 cw(c112.149,53.078) 112.149,53.848 cw(c112.149,54.618) v2@111.605,54.074 ; v2@111.784,53.443 cw(c112.762,52.465) 112.762,53.848 cw(c112.762,55.231) v2@111.784,54.253 ; R28.2@116.021,57.143 cw(c115.407,57.143) 115.841,56.71 cw(c116.275,56.276) R28.2@116.275,56.889 ; R28.2@116.454,56.964 cw(c116.888,56.53) 116.888,57.143 cw(c116.888,57.757) R28.2@116.454,57.323 ; v2@120.396,51.751 cw(c120.396,49.141) 122.241,50.987 ; v2@120.396,52.005 cw(c120.396,50.008) 121.808,51.42 ; v2(120.396,52.07) 121.158,52.07 122.428,50.8 LED41.1@125.857,50.8 ; v2@120.396,52.259 cw(c120.396,50.876) 121.374,51.854 ; LED42.1@125.331,58.315 ccw(c124.464,57.448) 124.464,58.674 ccw(c124.464,59.9) LED42.1@125.331,59.033 ; LED41.1@125.433,50.441 ccw(c124.566,49.574) 124.566,50.8 ccw(c124.566,52.026) LED41.1@125.433,51.159
  Top Layer w0.508: J1.12@5.898,54.547 ccw(c5.203,53.955) 5.203,54.868 ; J1.12@5.898,55.189 cw(c5.203,55.781) 5.203,54.868 ; J1.9@5.925,67.717 ccw(c5.079,66.871) 5.079,68.068 ccw(c5.079,69.265) J1.9@5.925,68.419 ; J1.12@6.276,54.868 5.203,54.868 ; J1.9@6.276,68.068 4.822,68.068 3.429,66.675 3.429,56.642 5.203,54.868 ; v2(27.686,85.852) 28.956,87.122 v2(32.385,87.122) v2@32.512,87.122 ; v2@27.686,86.298 ccw(c27.686,87.375) 28.447,86.613 ccw(c29.209,85.852) v2@28.132,85.852 ; v2@32.07,86.807 ccw(c31.308,86.045) 31.308,87.122 ccw(c31.308,88.199) v2@32.07,87.437 ; 33.02,24.003 R23.1@33.02,25.908 R22.1@33.02,28.448 R21.1@33.02,31.242 33.02,32.385 R20.1@33.02,33.782 R19.1@33.02,36.322 R18.1@33.02,38.862 R25.1@33.02,41.402 R24.1@33.02,43.942 ; R37.1@36.449,37.719 37.211,36.957 v2@37.592,36.957 ; R37.1@36.614,37.554 ccw(c37.592,38.532) v2@37.592,37.149 ; 36.92,37.248 cw(c36.376,36.703) v2@37.146,36.703 ; v2@37.277,36.388 cw(c36.515,35.626) 37.592,35.626 cw(c38.669,35.626) v2@37.907,36.388 ; 37.338,24.003 37.592,24.257 v2(37.592,36.703) v2@37.592,36.957 ; v2@37.596,37.149 ccw(c37.613,39.095) R36.1@38.989,37.719 38.227,36.957 v2@37.592,36.957 ; FB1.2@42.416,51.054 v1(43.942,51.054) ; FB1.2@42.686,50.785 cw(c43.336,50.134) 43.336,51.054 cw(c43.336,51.974) FB1.2@42.686,51.323 ; U5.8@107.428,63.297 108.636,63.297 108.839,63.5 ; U5.8@108.287,63.383 ccw(c107.864,64.262) v1(108.839,64.262) 108.839,63.5 ; U5.8@108.359,63.388 ccw(c108.509,63.83) 108.839,63.5 ; v2(108.912,46.282) 111.252,48.622 v2(111.252,49.403) ; v2@108.912,46.728 ccw(c108.912,47.805) 109.673,47.043 ccw(c110.435,46.282) v2@109.358,46.282 ; 109.938,47.309 ccw(c107.844,49.403) v2@110.806,49.403 ; 110.806,48.176 ccw(c109.579,49.403) v2@111.314,49.403
  Top Layer w1: FB1.2@42.416,51.054 42.416,27.938 38.481,24.003 37.338,24.003 33.02,24.003 32.766,23.749 32.766,7.112 v2(34.544,5.334) 80.137,5.334 86.233,11.43 93.726,11.43 95.885,9.271 ; v2(92.837,44.958) 100.076,44.958 113.284,31.75 113.284,17.526 109.855,14.097 100.711,14.097 95.885,9.271 ; C12.1@104.14,4.402 ccw(c104.14,7.058) 106.018,5.18 ; U6.4@116.04,8.599 ccw(c114.725,7.284) 114.725,9.143 ccw(c114.725,11.002) U6.4@116.04,9.688 ; U6.4@116.584,9.143 U6.2@110.488,9.143 107.949,9.143 106.426,7.62 106.426,5.588 C12.1@104.14,3.302 100.584,3.302 C11.2@98.552,5.334 97.028,5.334 95.885,6.477 95.885,9.271
  Bottom Layer w0.254: v2@111.605,53.622 cw(c112.149,53.078) 112.149,53.848 cw(c112.149,54.618) v2@111.605,54.074 ; v2@111.76,53.848 115.57,53.848 117.348,52.07 v2(120.396,52.07) ; v2@111.784,53.443 cw(c112.762,52.465) 112.762,53.848 cw(c112.762,55.231) v2@111.784,54.253 ; v2@119.991,51.665 ccw(c119.013,50.687) 119.013,52.07 ccw(c119.013,53.453) v2@119.991,52.475 ; v2@120.17,51.844 ccw(c119.626,51.3) 119.626,52.07 ccw(c119.626,52.84) v2@120.17,52.296
  Bottom Layer w0.508: 6.276,41.783 6.373,41.88 ; J1.9@6.276,68.068 15.297,77.089 25.56,77.089 27.686,79.215 v2(27.686,85.852) ; J1.9@6.276,68.564 ccw(c6.276,69.761) 7.123,68.915 ccw(c7.969,68.068) J1.9@6.772,68.068 ; v2@27.371,85.537 cw(c26.609,84.775) 27.686,84.775 cw(c28.763,84.775) v2@28.001,85.537 ; v2@32.07,87.437 ccw(c31.308,88.199) 32.385,88.199 ccw(c33.462,88.199) v2@32.7,87.437 ; v2(32.385,87.122) 32.385,91.44 34.671,93.726 P4.23@36.322,93.726 P4.21@38.862,93.726 ; P4.23@35.936,93.34 ccw(c35.004,92.408) 35.004,93.726 ccw(c35.004,95.044) P4.23@35.936,94.112 ; P4.23@36.708,93.34 cw(c37.64,92.408) 37.64,93.726 cw(c37.64,95.044) P4.23@36.708,94.112 ; P4.21@38.476,93.34 ccw(c37.544,92.408) 37.544,93.726 ccw(c37.544,95.044) P4.21@38.476,94.112 ; R34.2@39.751,66.929 cw(c39.751,66.316) 40.185,66.749 ; R34.2@39.751,67.056 39.878,67.056 40.64,66.294 40.64,57.658 43.942,54.356 v1(43.942,51.054) ; v2@108.466,46.282 ccw(c107.389,46.282) 108.151,47.043 ccw(c108.912,47.805) v2@108.912,46.728 ; v1(108.839,64.262) 108.839,63.5 108.204,62.865 105.41,62.865 C3.2@104.648,62.103 101.6,65.151 98.552,65.151 97.536,64.135 97.536,57.658 v2(108.912,46.282) ; v2@110.937,49.718 ccw(c110.175,50.48) 111.252,50.48 ccw(c112.329,50.48) v2@111.567,49.718 ; v2@111.064,53.533 cw(c110.609,53.078) 111.252,53.078 ; v2(111.252,49.403) v2@111.252,53.848 ; 111.252,52.465 cw(c112.762,52.465) v2@111.694,53.533
  Bottom Layer w1: J1.12@6.276,54.868 6.276,41.783 6.276,30.3 31.242,5.334 v2(34.544,5.334) ; v2(92.837,44.958) 107.588,44.958 v2(108.912,46.282)
VOUT1: P5.1 P5.2 P5.4 P5.6 P5.8 P5.10 P5.12 P5.14 P5.16 P5.18 P5.19 P5.20 U3.1 U3.2 | length 131.9
  Top Layer w0.508: U3.2@102.071,69.139 U3.1@102.071,70.409 92.207,70.409 85.09,77.526 85.09,82.931 85.725,83.566 88.646,83.566 95.123,90.043 107.061,90.043 P5.20@110.49,93.472 ; P5.20@109.944,93.472 cw(c108.626,93.472) 109.558,92.54 cw(c110.49,91.608) P5.20@110.49,92.926 ; P5.20@110.104,93.858 ccw(c109.172,94.79) 110.49,94.79 ccw(c111.808,94.79) 110.876,93.858 ccw(c111.808,94.79) 111.808,93.472 ccw(c111.808,92.154) P5.20@110.876,93.086 ; P5.19@110.104,95.626 cw(c109.172,94.694) 110.49,94.694 cw(c111.808,94.694) P5.19@110.876,95.626 ; P5.19@110.49,96.012 P5.20@110.49,93.472 ; P5.18@112.644,93.086 ccw(c111.712,92.154) 111.712,93.472 ccw(c111.712,94.79) P5.18@112.644,93.858 ; P5.18@113.416,93.086 cw(c114.348,92.154) 114.348,93.472 cw(c114.348,94.79) P5.18@113.416,93.858 ; P5.16@115.184,93.086 ccw(c114.252,92.154) 114.252,93.472 ccw(c114.252,94.79) P5.16@115.184,93.858 ; P5.16@115.956,93.086 cw(c116.888,92.154) 116.888,93.472 cw(c116.888,94.79) P5.16@115.956,93.858 ; P5.14@117.724,93.086 ccw(c116.792,92.154) 116.792,93.472 ccw(c116.792,94.79) P5.14@117.724,93.858 ; P5.14@118.496,93.086 cw(c119.428,92.154) 119.428,93.472 cw(c119.428,94.79) P5.14@118.496,93.858 ; P5.12@120.264,93.086 ccw(c119.332,92.154) 119.332,93.472 ccw(c119.332,94.79) P5.12@120.264,93.858 ; P5.12@121.036,93.086 cw(c121.968,92.154) 121.968,93.472 cw(c121.968,94.79) P5.12@121.036,93.858 ; P5.10@122.804,93.086 ccw(c121.872,92.154) 121.872,93.472 ccw(c121.872,94.79) P5.10@122.804,93.858 ; P5.10@123.576,93.086 cw(c124.508,92.154) 124.508,93.472 cw(c124.508,94.79) P5.10@123.576,93.858 ; P5.8@125.344,93.086 ccw(c124.412,92.154) 124.412,93.472 ccw(c124.412,94.79) P5.8@125.344,93.858 ; P5.8@126.116,93.086 cw(c127.048,92.154) 127.048,93.472 cw(c127.048,94.79) P5.8@126.116,93.858 ; P5.6@127.884,93.086 ccw(c126.952,92.154) 126.952,93.472 ccw(c126.952,94.79) P5.6@127.884,93.858 ; P5.6@128.656,93.086 cw(c129.588,92.154) 129.588,93.472 cw(c129.588,94.79) P5.6@128.656,93.858 ; P5.4@130.424,93.086 ccw(c129.492,92.154) 129.492,93.472 ccw(c129.492,94.79) P5.4@130.424,93.858 ; P5.4@131.196,93.086 cw(c132.128,92.154) 132.128,93.472 cw(c132.128,94.79) P5.4@131.196,93.858 ; P5.2@132.964,93.086 ccw(c132.032,92.154) 132.032,93.472 ccw(c132.032,94.79) 132.964,93.858 ccw(c132.032,94.79) 133.35,94.79 ccw(c134.668,94.79) P5.2@133.736,93.858 ; P5.1@132.964,95.626 cw(c132.032,94.694) 133.35,94.694 cw(c134.668,94.694) P5.1@133.736,95.626 ; P5.1@133.35,96.012 P5.2@133.35,93.472 P5.4@130.81,93.472 P5.6@128.27,93.472 P5.8@125.73,93.472 P5.10@123.19,93.472 P5.12@120.65,93.472 P5.14@118.11,93.472 P5.16@115.57,93.472 P5.18@113.03,93.472 P5.20@110.49,93.472
WP_SD: R27.2
WP_SD_1: CON1.10 R24.2 R26.1 R27.1 | length 18.8
  Top Layer w0.254: CON1.10@26.162,43.384 26.72,43.942 R24.2@31.623,43.942 ; R24.2@31.369,43.942 cw(c31.982,43.942) 31.549,44.376 ; R24.2@31.443,43.762 ccw(c31.01,43.329) 31.01,43.942 ccw(c31.01,44.555) R24.2@31.443,44.122 ; R24.2@31.471,44.145 ccw(c31.242,44.45) 31.623,44.45 ; R24.2@31.775,44.145 cw(c32.004,44.45) 31.623,44.45 ; R24.2@31.877,43.942 cw(c33.717,43.942) 32.416,45.243 ; 31.982,44.809 ccw(c32.849,43.942) R24.2@31.623,43.942 ; R26.1@32.84,46.302 cw(c32.407,45.869) 33.02,45.869 cw(c33.633,45.869) R26.1@33.2,46.302 ; R26.1@32.84,46.662 ccw(c32.407,47.095) 33.02,47.095 ccw(c33.633,47.095) R26.1@33.2,46.662 ; R27.1@32.84,48.842 cw(c32.407,48.409) 33.02,48.409 cw(c33.633,48.409) R27.1@33.2,48.842 ; R27.1@33.02,49.022 R26.1@33.02,46.482 33.02,45.847 31.623,44.45 ; R24.2@31.623,43.942 31.623,44.45
pads on no net: CON1.16 CON1.17 J1.7 P4.9 P4.11 P5.3 P5.5 P5.7 P5.9 P6.14 P6.25 P6.26 P7.1 P7.14 P7.23 P7.41 U1.5 U3.5 U3.6 U3.7 U4.19 U4.46

## Polygon pours and split planes (outlines as drawn)
GND on Top Layer "TopOverlay-No Net" (hatched 90Degree grid 0.508 track 0.254, remove dead copper, pour order 1000): -8.156,107.342 188.694,107.342 188.694,-4.291 188.567,-4.164 -8.156,-4.164
GND on Bottom Layer "TopOverlay-No Net" (hatched 90Degree grid 0.508 track 0.254, remove dead copper, pour order 1001): -7.428,108.105 189.422,108.105 189.422,-3.528 189.295,-3.401 -7.428,-3.401

## Keep-outs
Keep-Out Layer:
  lines w0.254: 0,5 ccw(c5,5) 5,0 175,0 ccw(c175,5) 180,5 180,95 ccw(c175,95) 175,100 5,100 ccw(c5,95) 0,95 0,5
  lines w0.6: 117.484,19.384 117.484,31.322 ; 117.6,34.37 117.6,46.308 ; 146.812,17.526 146.812,29.464 ; 146.812,36.576 146.812,48.514 ; 146.812,55.372 146.812,67.31 ; 146.812,74.168 146.812,86.106

## Silkscreen, mask and mechanical layers (free items; w line width, h text height)
Top Overlay:
  circle w0.254: c30.56,81.336 r1.552
  circle w0.254: c112.442,81.336 r1.552
  circle w0.254: c30.56,18.796 r1.552
  circle w0.254: c114.22,18.796 r1.552
  rectangle: 102.74,17.526 110.49,22.606
  lines w0.254: 25.56,18.796 ccw(c30.56,18.796) 30.56,13.796 ; 25.56,18.796 25.56,81.336 ; 25.56,18.796 25.56,81.336 ; 25.56,81.336 cw(c30.56,81.336) 30.56,86.336 ; 30.56,13.796 114.22,13.796 ; 30.56,13.796 114.22,13.796 ; 30.56,86.336 114.22,86.336 ; 30.56,86.336 114.22,86.336 ; 114.22,13.796 ccw(c114.22,18.796) 119.22,18.796 ; 114.22,86.336 cw(c114.22,81.336) 119.22,81.336 ; 119.22,18.796 119.22,81.336 ; 119.22,18.796 119.22,81.336 ; 34.16,17.526 110.49,17.526 110.49,22.606 34.16,22.606 34.16,17.526 ; 34.16,77.526 110.49,77.526 110.49,82.606 34.16,82.606 34.16,77.526
Mechanical 1:
  lines w0.254: 0,5 0,95 ; 5,0 175,0 ; 5,100 175,100 ; 180,5 180,95